# EAGLE board SparkFun_EL_Escudo_Dos_Panel_v21 (EAGLE 7.4.0), part 1 of 3
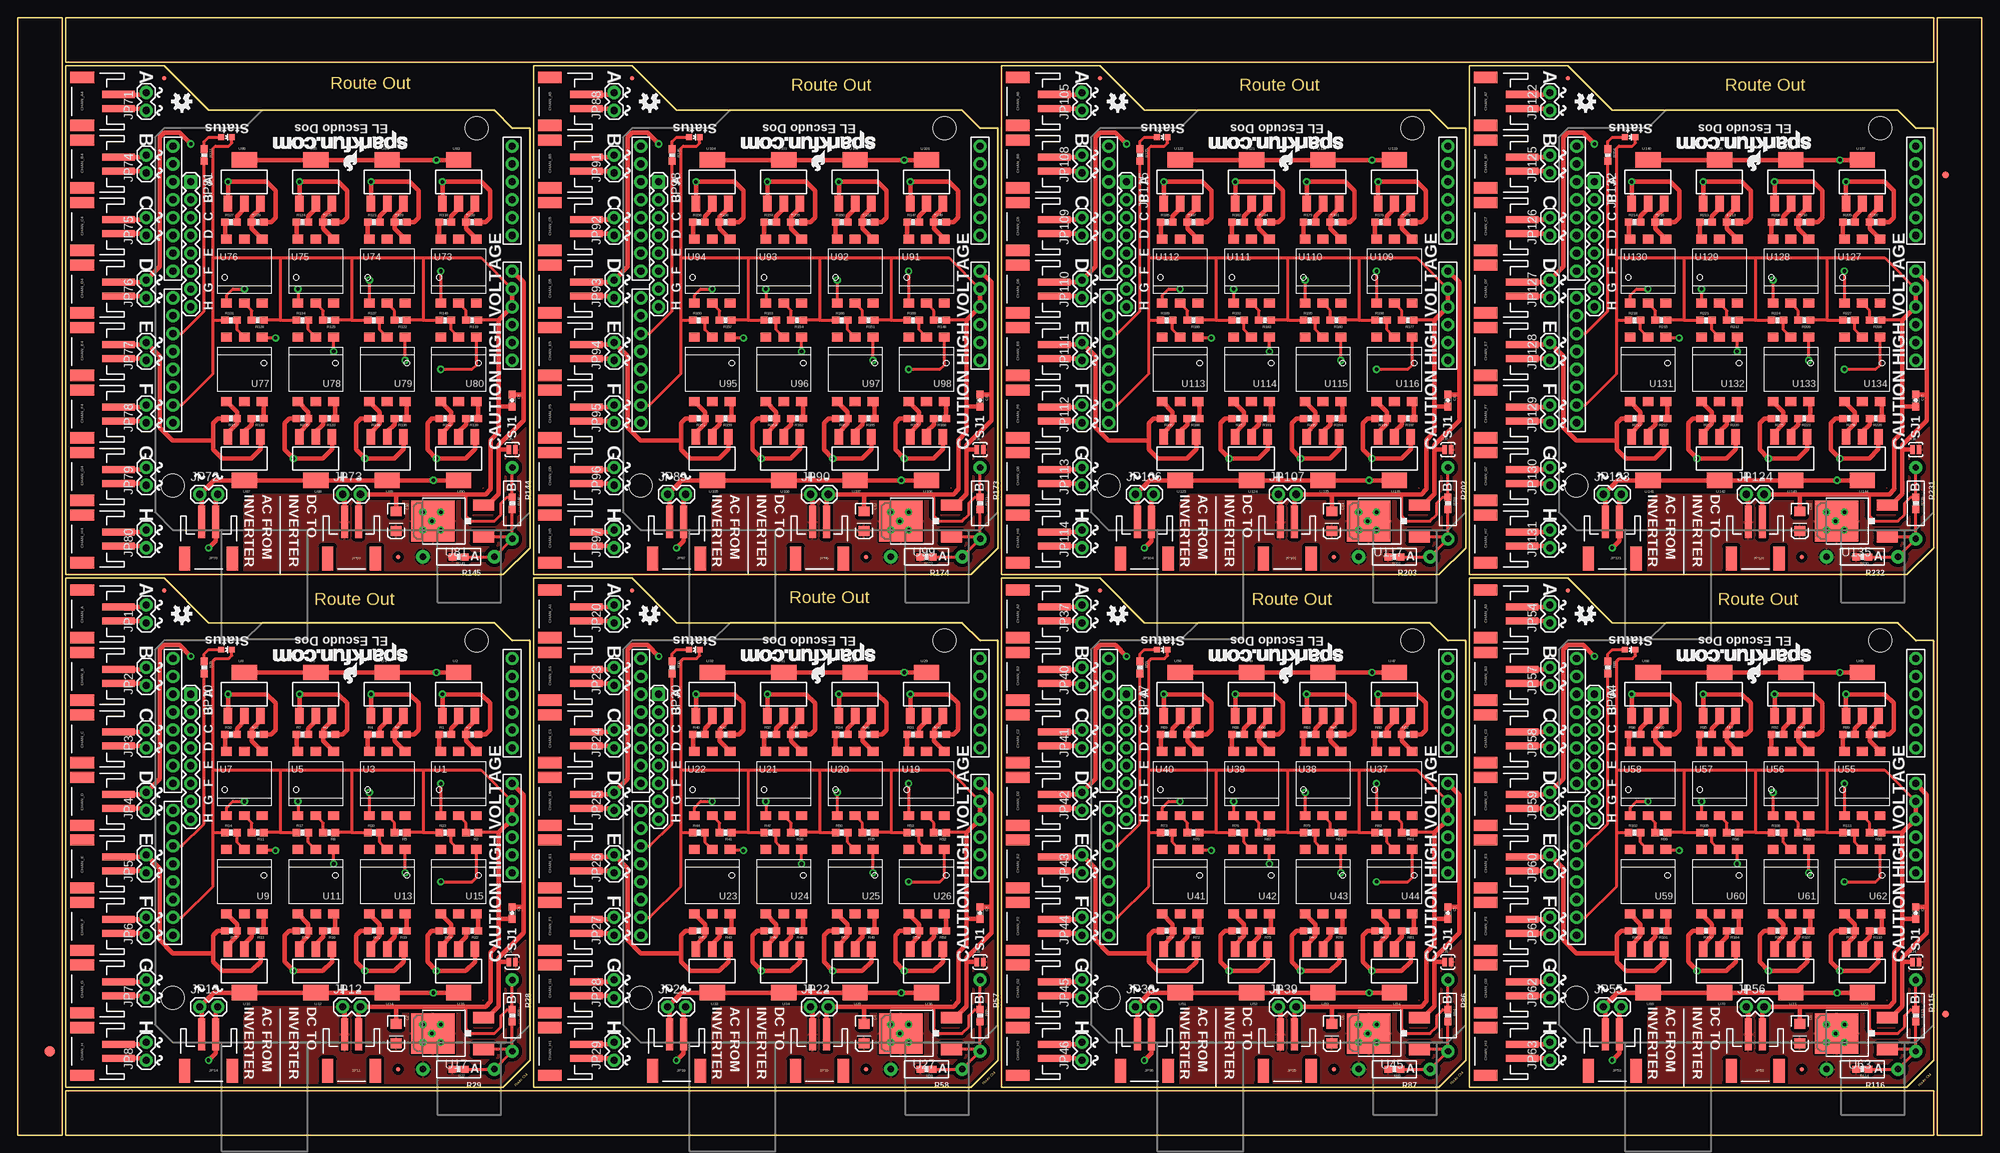
[diagram p0: board, top side]
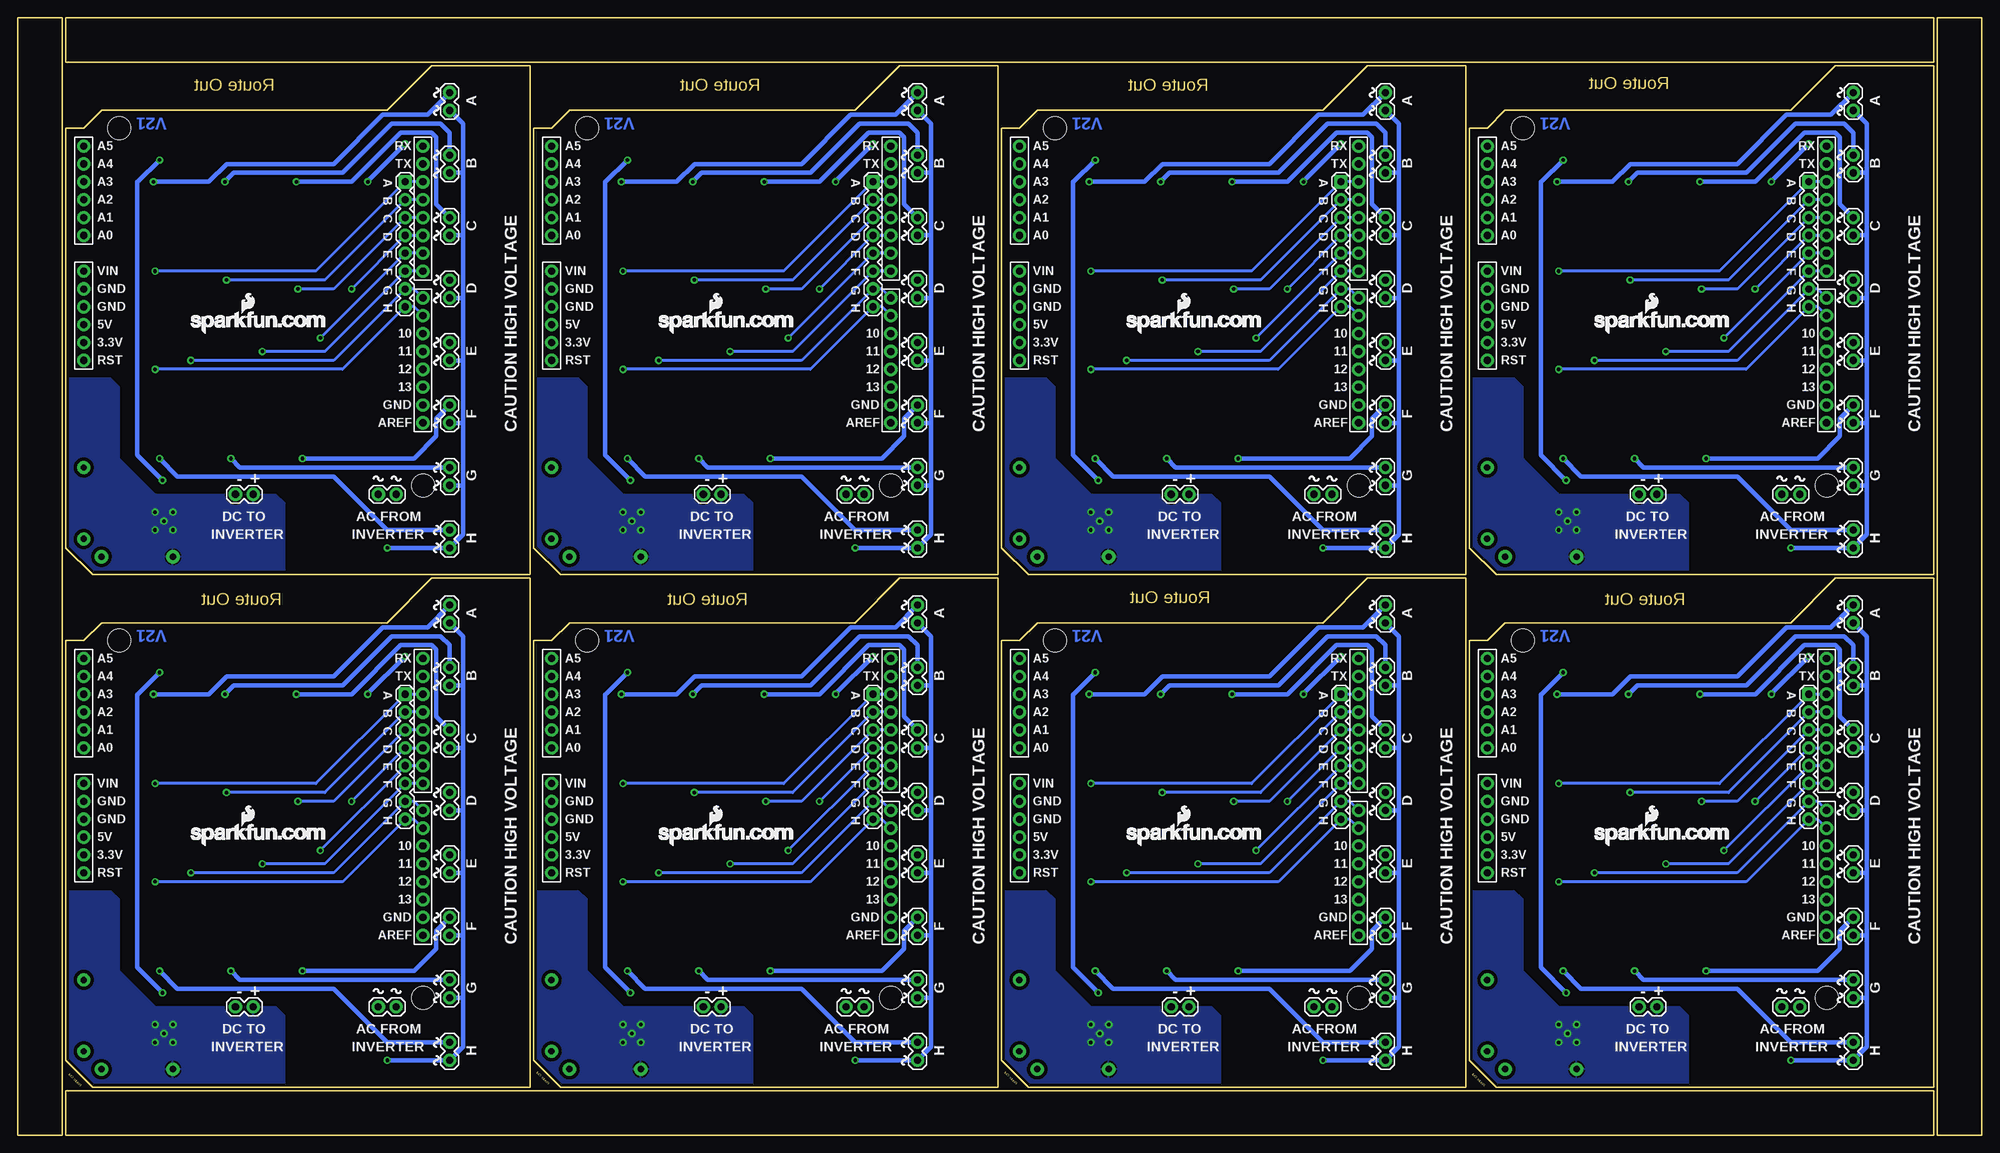
[diagram p1: board, bottom side, seen from below]

Size 279.4 x 159 mm. Coordinates in mm from the lower left corner, seen from the top.
Outline: 6.35,79.25 6.35,0 0,0 0,29.72
Outline: 0,27.18 0,159 6.35,159 6.35,76.71
Outline: 79.25,0 6.86,0 6.86,6.35 29.72,6.35
Outline: 27.18,6.35 272.54,6.35 272.54,0 76.71,0
Outline: 279.4,79.25 279.4,0 273.05,0 273.05,29.72
Outline: 273.05,27.18 273.05,159 279.4,159 279.4,76.71
Outline: 199.39,159 272.54,159 272.54,152.65 248.92,152.65
Outline: 251.46,152.65 6.86,152.65 6.86,159 201.93,159
Outline: 27.18,72.9 20.83,79.25 6.86,79.25 6.86,6.86 69.09,6.86 72.9,10.67 72.9,70.36 70.36,70.36 67.82,72.9 27.18,72.9
Outline: 93.73,72.9 87.38,79.25 73.41,79.25 73.41,6.86 135.64,6.86 139.45,10.67 139.45,70.36 136.91,70.36 134.37,72.9 93.73,72.9
Outline: 160.27,72.9 153.92,79.25 139.95,79.25 139.95,6.86 202.18,6.86 205.99,10.67 205.99,70.36 203.45,70.36 200.91,72.9 160.27,72.9
Outline: 226.82,72.9 220.47,79.25 206.5,79.25 206.5,6.86 268.73,6.86 272.54,10.67 272.54,70.36 270,70.36 267.46,72.9 226.82,72.9
Outline: 27.18,145.8 20.83,152.15 6.86,152.15 6.86,79.76 69.09,79.76 72.9,83.57 72.9,143.26 70.36,143.26 67.82,145.8 27.18,145.8
Outline: 93.73,145.8 87.38,152.15 73.41,152.15 73.41,79.76 135.64,79.76 139.45,83.57 139.45,143.26 136.91,143.26 134.37,145.8 93.73,145.8
Outline: 160.27,145.8 153.92,152.15 139.95,152.15 139.95,79.76 202.18,79.76 205.99,83.57 205.99,143.26 203.45,143.26 200.91,145.8 160.27,145.8
Outline: 226.82,145.8 220.47,152.15 206.5,152.15 206.5,79.76 268.73,79.76 272.54,83.57 272.54,143.26 270,143.26 267.46,145.8 226.82,145.8
Copper layers (1*16): Top 0.035mm / dielectric 1.5mm / Bottom 0.035mm
Design rules "default": minimum track width 8mil, minimum drill 20mil, track to track 0.5mm, track to pad 0.5mm, pad to pad 0.5mm, via to via 0.5mm, smd to smd 8mil, copper to edge 10mil, drill to drill 8mil, minimum pad ring 12mil, minimum via ring 10mil, stop-mask expansion 4mil, vias tented up to drill 25mil, thermal gap 10mil
Net classes: 0 Default: width 0.203 mm; 1 VCC: width 0.305 mm; 2 GND: width 0.813 mm; 3 HV: width 0.381 mm

## Footprints (pad centres in the part's own frame; a part is rotated, then mirrored left to right if it is on the bottom)
0603-CAP = smd 1.1 x 1: 1 -0.85,0; 2 0.85,0
EIA3216 = smd 1.4 x 1.6: A 1.4,0; C -1.4,0
JST-2-SMD = smd 1 x 4.6: 1 -1,-3.7; 2 1,-3.7 | smd 1.6 x 3.4: NC1 -3.4,1.5; NC2 3.4,1.5
LED-0603 = smd 0.8 x 0.8: A 0,-0.75; C 0,0.75
FIDUCIAL-1.5X3 = smd 1.5 x 1.5: 1 0,0
FIDUCIAL-1X2 = smd 1 x 1: 1 0,0
1X02 = drill 1.016 pad 1.88: 1 0,0; 2 2.54,0
1X08 = drill 1.016 pad 1.88 square: 1 0,0 | drill 1.016 pad 1.88: 2 2.54,0; 3 5.08,0; 4 7.62,0; 5 10.16,0; 6 12.7,0; 7 15.24,0; 8 17.78,0
MICRO-FIDUCIAL = smd 0.635 x 0.635: 1 0,0
0603-RES = smd 1.1 x 1: 1 -0.85,0; 2 0.85,0
AXIAL-0.4 = drill 0.9 pad 1.88: P$1 -5.08,0; P$2 5.08,0
SJ_2S-NO = smd 0.635 x 1.27: 1 -0.45,0; 2 0.45,0
DIP8SMD = smd 1.524 x 1.27: 1 -2.54,-4.572; 2 0,-4.572; 3 2.54,-4.572; 4 2.54,4.572; 5 0,4.572; 6 -2.54,4.572
SOT223 = smd 1.219 x 2.235: 1 -2.311,-3.099; 2 0,-3.099; 3 2.311,-3.099 | smd 3.6 x 2.2: 4 0,3.099
V-REG_DPACK = smd 1.6 x 3: 1 -2.28,-4.8; 3 2.28,-4.8 | smd 5.8 x 6.2: 4 0,2.38
DUEMILANOVE_SHIELD_NOLABELS = drill 1.016 pad 1.88: 3.3V 50.8,26.67; 5V 50.8,29.21; A0 50.8,41.91; A1 50.8,44.45; A2 50.8,46.99; A3 50.8,49.53; A4 50.8,52.07; A5 50.8,54.61; AREF 2.54,15.24; D2 2.54,49.53; D3 2.54,46.99; D4 2.54,44.45; D5 2.54,41.91; D6 2.54,39.37; D7 2.54,36.83; D8 2.54,33.02; D9 2.54,30.48; D10 2.54,27.94; D11 2.54,25.4; D12 2.54,22.86; D13 2.54,20.32; GND@0 50.8,31.75; GND@1 50.8,34.29; GND@2 2.54,17.78; RES 50.8,24.13; RX 2.54,54.61; TX 2.54,52.07; VIN 50.8,36.83 | hole 3.302: 45.72,57.15; 2.54,6.35

## Placement (x,y rotation side)
C1  0.1uF  [0603-CAP]  70.36,31.62 270 top
C2  10uF  [EIA3216]  53.85,14.48 270 top
C3  0.1uF  [0603-CAP]  136.91,31.62 270 top
C4  10uF  [EIA3216]  120.4,14.48 270 top
C5  0.1uF  [0603-CAP]  203.45,31.62 270 top
C6  10uF  [EIA3216]  186.94,14.48 270 top
C7  0.1uF  [0603-CAP]  270,31.62 270 top
C8  10uF  [EIA3216]  253.49,14.48 270 top
C9  0.1uF  [0603-CAP]  70.36,104.52 270 top
C10  10uF  [EIA3216]  53.85,87.38 270 top
C11  0.1uF  [0603-CAP]  136.91,104.52 270 top
C12  10uF  [EIA3216]  120.4,87.38 270 top
C13  0.1uF  [0603-CAP]  203.45,104.52 270 top
C14  10uF  [EIA3216]  186.94,87.38 270 top
C15  0.1uF  [0603-CAP]  270,104.52 270 top
C16  10uF  [EIA3216]  253.49,87.38 270 top
CHAN_A  [JST-2-SMD]  10.67,74.17 90 top
CHAN_A1  [JST-2-SMD]  77.22,74.17 90 top
CHAN_A2  [JST-2-SMD]  143.76,74.17 90 top
CHAN_A3  [JST-2-SMD]  210.31,74.17 90 top
CHAN_A4  [JST-2-SMD]  10.67,147.07 90 top
CHAN_A5  [JST-2-SMD]  77.22,147.07 90 top
CHAN_A6  [JST-2-SMD]  143.76,147.07 90 top
CHAN_A7  [JST-2-SMD]  210.31,147.07 90 top
CHAN_B  [JST-2-SMD]  10.67,65.28 90 top
CHAN_B1  [JST-2-SMD]  77.22,65.28 90 top
CHAN_B2  [JST-2-SMD]  143.76,65.28 90 top
CHAN_B3  [JST-2-SMD]  210.31,65.28 90 top
CHAN_B4  [JST-2-SMD]  10.67,138.18 90 top
CHAN_B5  [JST-2-SMD]  77.22,138.18 90 top
CHAN_B6  [JST-2-SMD]  143.76,138.18 90 top
CHAN_B7  [JST-2-SMD]  210.31,138.18 90 top
CHAN_C  [JST-2-SMD]  10.67,56.39 90 top
CHAN_C1  [JST-2-SMD]  77.22,56.39 90 top
CHAN_C2  [JST-2-SMD]  143.76,56.39 90 top
CHAN_C3  [JST-2-SMD]  210.31,56.39 90 top
CHAN_C4  [JST-2-SMD]  10.67,129.29 90 top
CHAN_C5  [JST-2-SMD]  77.22,129.29 90 top
CHAN_C6  [JST-2-SMD]  143.76,129.29 90 top
CHAN_C7  [JST-2-SMD]  210.31,129.29 90 top
CHAN_D  [JST-2-SMD]  10.67,47.5 90 top
CHAN_D1  [JST-2-SMD]  77.22,47.5 90 top
CHAN_D2  [JST-2-SMD]  143.76,47.5 90 top
CHAN_D3  [JST-2-SMD]  210.31,47.5 90 top
CHAN_D4  [JST-2-SMD]  10.67,120.4 90 top
CHAN_D5  [JST-2-SMD]  77.22,120.4 90 top
CHAN_D6  [JST-2-SMD]  143.76,120.4 90 top
CHAN_D7  [JST-2-SMD]  210.31,120.4 90 top
CHAN_E  [JST-2-SMD]  10.67,38.61 90 top
CHAN_E1  [JST-2-SMD]  77.22,38.61 90 top
CHAN_E2  [JST-2-SMD]  143.76,38.61 90 top
CHAN_E3  [JST-2-SMD]  210.31,38.61 90 top
CHAN_E4  [JST-2-SMD]  10.67,111.51 90 top
CHAN_E5  [JST-2-SMD]  77.22,111.51 90 top
CHAN_E6  [JST-2-SMD]  143.76,111.51 90 top
CHAN_E7  [JST-2-SMD]  210.31,111.51 90 top
CHAN_F  [JST-2-SMD]  10.67,29.72 90 top
CHAN_F1  [JST-2-SMD]  77.22,29.72 90 top
CHAN_F2  [JST-2-SMD]  143.76,29.72 90 top
CHAN_F3  [JST-2-SMD]  210.31,29.72 90 top
CHAN_F4  [JST-2-SMD]  10.67,102.62 90 top
CHAN_F5  [JST-2-SMD]  77.22,102.62 90 top
CHAN_F6  [JST-2-SMD]  143.76,102.62 90 top
CHAN_F7  [JST-2-SMD]  210.31,102.62 90 top
CHAN_G  [JST-2-SMD]  10.67,20.83 90 top
CHAN_G1  [JST-2-SMD]  77.22,20.83 90 top
CHAN_G2  [JST-2-SMD]  143.76,20.83 90 top
CHAN_G3  [JST-2-SMD]  210.31,20.83 90 top
CHAN_G4  [JST-2-SMD]  10.67,93.73 90 top
CHAN_G5  [JST-2-SMD]  77.22,93.73 90 top
CHAN_G6  [JST-2-SMD]  143.76,93.73 90 top
CHAN_G7  [JST-2-SMD]  210.31,93.73 90 top
CHAN_H  [JST-2-SMD]  10.67,11.94 90 top
CHAN_H1  [JST-2-SMD]  77.22,11.94 90 top
CHAN_H2  [JST-2-SMD]  143.76,11.94 90 top
CHAN_H3  [JST-2-SMD]  210.31,11.94 90 top
CHAN_H4  [JST-2-SMD]  10.67,84.84 90 top
CHAN_H5  [JST-2-SMD]  77.22,84.84 90 top
CHAN_H6  [JST-2-SMD]  143.76,84.84 90 top
CHAN_H7  [JST-2-SMD]  210.31,84.84 90 top
D1  Status  [LED-0603]  29.72,69.09 270 top
D2  Status  [LED-0603]  96.27,69.09 270 top
D3  Status  [LED-0603]  162.81,69.09 270 top
D4  Status  [LED-0603]  229.36,69.09 270 top
D5  Status  [LED-0603]  29.72,141.99 270 top
D6  Status  [LED-0603]  96.27,141.99 270 top
D7  Status  [LED-0603]  162.81,141.99 270 top
D8  Status  [LED-0603]  229.36,141.99 270 top
E$1  [FIDUCIAL-1.5X3]  4.57,11.94 0 top
E$5  [FIDUCIAL-1X2]  274.19,17.27 0 top
E$6  [FIDUCIAL-1X2]  274.19,136.65 180 top
JP1  [1X02]  18.29,72.9 90 top
JP2  [1X02]  18.29,64.01 90 top
JP3  [1X02]  18.29,55.12 90 top
JP4  [1X02]  18.29,46.23 90 top
JP5  [1X02]  18.29,37.34 90 top
JP6  [1X02]  18.29,28.45 90 top
JP7  [1X02]  18.29,19.56 90 top
JP8  [1X02]  18.29,10.67 90 top
JP9  LOGO-SFENEW  [SFE-NEW-WEBLOGO]  55.44,70.04 180 top
JP10  [1X08]  24.64,62.74 270 top
JP11  [JST-2-SMD]  47.5,10.67 180 top
JP12  [1X02]  46.23,18.29 0 top
JP13  [1X02]  25.91,18.29 0 top
JP14  [JST-2-SMD]  27.18,10.67 180 top
JP15  LOGO-SFENEW  [SFE-NEW-WEBLOGO]  55.12,41.15 0 bottom
JP16  FIDUCIALUFIDUCIAL  [MICRO-FIDUCIAL]  20.83,77.47 0 top
JP17  FIDUCIALUFIDUCIAL  [MICRO-FIDUCIAL]  54.1,9.4 0 top
JP18  [JST-2-SMD]  114.05,10.67 180 top
JP19  [JST-2-SMD]  93.73,10.67 180 top
JP20  [1X02]  84.84,72.9 90 top
JP21  [1X02]  92.46,18.29 0 top
JP22  [1X02]  112.78,18.29 0 top
JP23  [1X02]  84.84,64.01 90 top
JP24  [1X02]  84.84,55.12 90 top
JP25  [1X02]  84.84,46.23 90 top
JP26  [1X02]  84.84,37.34 90 top
JP27  [1X02]  84.84,28.45 90 top
JP28  [1X02]  84.84,19.56 90 top
JP29  [1X02]  84.84,10.67 90 top
JP30  [1X08]  91.19,62.74 270 top
JP31  LOGO-SFENEW  [SFE-NEW-WEBLOGO]  121.98,70.04 180 top
JP32  LOGO-SFENEW  [SFE-NEW-WEBLOGO]  121.67,41.15 0 bottom
JP33  FIDUCIALUFIDUCIAL  [MICRO-FIDUCIAL]  87.38,77.47 0 top
JP34  FIDUCIALUFIDUCIAL  [MICRO-FIDUCIAL]  120.65,9.4 0 top
JP35  [JST-2-SMD]  180.59,10.67 180 top
JP36  [JST-2-SMD]  160.27,10.67 180 top
JP37  [1X02]  151.38,72.9 90 top
JP38  [1X02]  159,18.29 0 top
JP39  [1X02]  179.32,18.29 0 top
JP40  [1X02]  151.38,64.01 90 top
JP41  [1X02]  151.38,55.12 90 top
JP42  [1X02]  151.38,46.23 90 top
JP43  [1X02]  151.38,37.34 90 top
JP44  [1X02]  151.38,28.45 90 top
JP45  [1X02]  151.38,19.56 90 top
JP46  [1X02]  151.38,10.67 90 top
JP47  [1X08]  157.73,62.74 270 top
JP48  LOGO-SFENEW  [SFE-NEW-WEBLOGO]  188.53,70.04 180 top
JP49  LOGO-SFENEW  [SFE-NEW-WEBLOGO]  188.21,41.15 0 bottom
JP50  FIDUCIALUFIDUCIAL  [MICRO-FIDUCIAL]  153.92,77.47 0 top
JP51  FIDUCIALUFIDUCIAL  [MICRO-FIDUCIAL]  187.2,9.4 0 top
JP52  [JST-2-SMD]  247.14,10.67 180 top
JP53  [JST-2-SMD]  226.82,10.67 180 top
JP54  [1X02]  217.93,72.9 90 top
JP55  [1X02]  225.55,18.29 0 top
JP56  [1X02]  245.87,18.29 0 top
JP57  [1X02]  217.93,64.01 90 top
JP58  [1X02]  217.93,55.12 90 top
JP59  [1X02]  217.93,46.23 90 top
JP60  [1X02]  217.93,37.34 90 top
JP61  [1X02]  217.93,28.45 90 top
JP62  [1X02]  217.93,19.56 90 top
JP63  [1X02]  217.93,10.67 90 top
JP64  [1X08]  224.28,62.74 270 top
JP65  LOGO-SFENEW  [SFE-NEW-WEBLOGO]  255.08,70.04 180 top
JP66  LOGO-SFENEW  [SFE-NEW-WEBLOGO]  254.76,41.15 0 bottom
JP67  FIDUCIALUFIDUCIAL  [MICRO-FIDUCIAL]  220.47,77.47 0 top
JP68  FIDUCIALUFIDUCIAL  [MICRO-FIDUCIAL]  253.75,9.4 0 top
JP69  [JST-2-SMD]  47.5,83.57 180 top
JP70  [JST-2-SMD]  27.18,83.57 180 top
JP71  [1X02]  18.29,145.8 90 top
JP72  [1X02]  25.91,91.19 0 top
JP73  [1X02]  46.23,91.19 0 top
JP74  [1X02]  18.29,136.91 90 top
JP75  [1X02]  18.29,128.02 90 top
JP76  [1X02]  18.29,119.13 90 top
JP77  [1X02]  18.29,110.24 90 top
JP78  [1X02]  18.29,101.35 90 top
JP79  [1X02]  18.29,92.46 90 top
JP80  [1X02]  18.29,83.57 90 top
JP81  [1X08]  24.64,135.64 270 top
JP82  LOGO-SFENEW  [SFE-NEW-WEBLOGO]  55.44,142.94 180 top
JP83  LOGO-SFENEW  [SFE-NEW-WEBLOGO]  55.12,114.05 0 bottom
JP84  FIDUCIALUFIDUCIAL  [MICRO-FIDUCIAL]  20.83,150.37 0 top
JP85  FIDUCIALUFIDUCIAL  [MICRO-FIDUCIAL]  54.1,82.3 0 top
JP86  [JST-2-SMD]  114.05,83.57 180 top
JP87  [JST-2-SMD]  93.73,83.57 180 top
JP88  [1X02]  84.84,145.8 90 top
JP89  [1X02]  92.46,91.19 0 top
JP90  [1X02]  112.78,91.19 0 top
JP91  [1X02]  84.84,136.91 90 top
JP92  [1X02]  84.84,128.02 90 top
JP93  [1X02]  84.84,119.13 90 top
JP94  [1X02]  84.84,110.24 90 top
JP95  [1X02]  84.84,101.35 90 top
JP96  [1X02]  84.84,92.46 90 top
JP97  [1X02]  84.84,83.57 90 top
JP98  [1X08]  91.19,135.64 270 top
JP99  LOGO-SFENEW  [SFE-NEW-WEBLOGO]  121.98,142.94 180 top
JP100  LOGO-SFENEW  [SFE-NEW-WEBLOGO]  121.67,114.05 0 bottom
JP101  FIDUCIALUFIDUCIAL  [MICRO-FIDUCIAL]  87.38,150.37 0 top
JP102  FIDUCIALUFIDUCIAL  [MICRO-FIDUCIAL]  120.65,82.3 0 top
JP103  [JST-2-SMD]  180.59,83.57 180 top
JP104  [JST-2-SMD]  160.27,83.57 180 top
JP105  [1X02]  151.38,145.8 90 top
JP106  [1X02]  159,91.19 0 top
JP107  [1X02]  179.32,91.19 0 top
JP108  [1X02]  151.38,136.91 90 top
JP109  [1X02]  151.38,128.02 90 top
JP110  [1X02]  151.38,119.13 90 top
JP111  [1X02]  151.38,110.24 90 top
JP112  [1X02]  151.38,101.35 90 top
JP113  [1X02]  151.38,92.46 90 top
JP114  [1X02]  151.38,83.57 90 top
JP115  [1X08]  157.73,135.64 270 top
JP116  LOGO-SFENEW  [SFE-NEW-WEBLOGO]  188.53,142.94 180 top
JP117  LOGO-SFENEW  [SFE-NEW-WEBLOGO]  188.21,114.05 0 bottom
JP118  FIDUCIALUFIDUCIAL  [MICRO-FIDUCIAL]  153.92,150.37 0 top
JP119  FIDUCIALUFIDUCIAL  [MICRO-FIDUCIAL]  187.2,82.3 0 top
JP120  [JST-2-SMD]  247.14,83.57 180 top
JP121  [JST-2-SMD]  226.82,83.57 180 top
JP122  [1X02]  217.93,145.8 90 top
JP123  [1X02]  225.55,91.19 0 top
JP124  [1X02]  245.87,91.19 0 top
JP125  [1X02]  217.93,136.91 90 top
JP126  [1X02]  217.93,128.02 90 top
JP127  [1X02]  217.93,119.13 90 top
JP128  [1X02]  217.93,110.24 90 top
JP129  [1X02]  217.93,101.35 90 top
JP130  [1X02]  217.93,92.46 90 top
JP131  [1X02]  217.93,83.57 90 top
JP132  [1X08]  224.28,135.64 270 top
JP133  LOGO-SFENEW  [SFE-NEW-WEBLOGO]  255.08,142.94 180 top
JP134  LOGO-SFENEW  [SFE-NEW-WEBLOGO]  254.76,114.05 0 bottom
JP135  FIDUCIALUFIDUCIAL  [MICRO-FIDUCIAL]  220.47,150.37 0 top
JP136  FIDUCIALUFIDUCIAL  [MICRO-FIDUCIAL]  253.75,82.3 0 top
R1  330  [0603-RES]  60.83,57.02 0 top
R2  390  [0603-RES]  64.64,43.05 180 top
R3  330  [0603-RES]  64.64,57.02 0 top
R4  330  [0603-RES]  50.67,57.02 0 top
R5  390  [0603-RES]  54.48,43.05 180 top
R6  330  [0603-RES]  54.48,57.02 0 top
R7  330  [0603-RES]  40.51,57.02 0 top
R8  390  [0603-RES]  44.32,43.05 180 top
R9  330  [0603-RES]  44.32,57.02 0 top
R10  330  [0603-RES]  30.35,57.02 0 top
R11  390  [0603-RES]  34.16,43.05 180 top
R12  330  [0603-RES]  34.16,57.02 0 top
R13  330  [0603-RES]  34.16,29.08 180 top
R14  390  [0603-RES]  30.35,43.05 0 top
R15  330  [0603-RES]  30.35,29.08 180 top
R16  330  [0603-RES]  44.32,29.08 180 top
R17  390  [0603-RES]  40.51,43.05 0 top
R18  330  [0603-RES]  40.51,29.08 180 top
R19  330  [0603-RES]  54.48,29.08 180 top
R20  390  [0603-RES]  50.67,43.05 0 top
R21  330  [0603-RES]  50.67,29.08 180 top
R22  330  [0603-RES]  64.64,29.08 180 top
R23  390  [0603-RES]  60.83,43.05 0 top
R24  330  [0603-RES]  60.83,29.08 180 top
R25  330  [0603-RES]  26.54,66.55 270 top
R26  390  [0603-RES]  70.36,17.02 270 top
R27  240  [0603-RES]  62.74,9.4 180 top
R28  B  [AXIAL-0.4]  70.36,17.02 270 top
R29  A  [AXIAL-0.4]  62.74,9.4 180 top
R30  330  [0603-RES]  93.09,66.55 270 top
R31  330  [0603-RES]  127.38,57.02 0 top
R32  390  [0603-RES]  131.19,43.05 180 top
R33  330  [0603-RES]  131.19,57.02 0 top
R34  330  [0603-RES]  117.22,57.02 0 top
R35  390  [0603-RES]  121.03,43.05 180 top
R36  330  [0603-RES]  121.03,57.02 0 top
R37  330  [0603-RES]  107.06,57.02 0 top
R38  390  [0603-RES]  110.87,43.05 180 top
R39  330  [0603-RES]  110.87,57.02 0 top
R40  330  [0603-RES]  96.9,57.02 0 top
R41  390  [0603-RES]  100.71,43.05 180 top
R42  330  [0603-RES]  100.71,57.02 0 top
R43  330  [0603-RES]  100.71,29.08 180 top
R44  390  [0603-RES]  96.9,43.05 0 top
R45  330  [0603-RES]  96.9,29.08 180 top
R46  330  [0603-RES]  110.87,29.08 180 top
R47  390  [0603-RES]  107.06,43.05 0 top
R48  330  [0603-RES]  107.06,29.08 180 top
R49  330  [0603-RES]  121.03,29.08 180 top
R50  390  [0603-RES]  117.22,43.05 0 top
R51  330  [0603-RES]  117.22,29.08 180 top
R52  330  [0603-RES]  131.19,29.08 180 top
R53  390  [0603-RES]  127.38,43.05 0 top
R54  330  [0603-RES]  127.38,29.08 180 top
R55  390  [0603-RES]  136.91,17.02 270 top
R56  240  [0603-RES]  129.29,9.4 180 top
R57  B  [AXIAL-0.4]  136.91,17.02 270 top
R58  A  [AXIAL-0.4]  129.29,9.4 180 top
R59  330  [0603-RES]  159.64,66.55 270 top
R60  330  [0603-RES]  193.93,57.02 0 top
R61  390  [0603-RES]  197.74,43.05 180 top
R62  330  [0603-RES]  197.74,57.02 0 top
R63  330  [0603-RES]  183.77,57.02 0 top
R64  390  [0603-RES]  187.58,43.05 180 top
R65  330  [0603-RES]  187.58,57.02 0 top
R66  330  [0603-RES]  173.61,57.02 0 top
R67  390  [0603-RES]  177.42,43.05 180 top
R68  330  [0603-RES]  177.42,57.02 0 top
R69  330  [0603-RES]  163.45,57.02 0 top
R70  390  [0603-RES]  167.26,43.05 180 top
R71  330  [0603-RES]  167.26,57.02 0 top
R72  330  [0603-RES]  167.26,29.08 180 top
R73  390  [0603-RES]  163.45,43.05 0 top
R74  330  [0603-RES]  163.45,29.08 180 top
R75  330  [0603-RES]  177.42,29.08 180 top
R76  390  [0603-RES]  173.61,43.05 0 top
R77  330  [0603-RES]  173.61,29.08 180 top
R78  330  [0603-RES]  187.58,29.08 180 top
R79  390  [0603-RES]  183.77,43.05 0 top
R80  330  [0603-RES]  183.77,29.08 180 top
R81  330  [0603-RES]  197.74,29.08 180 top
R82  390  [0603-RES]  193.93,43.05 0 top
R83  330  [0603-RES]  193.93,29.08 180 top
R84  390  [0603-RES]  203.45,17.02 270 top
R85  240  [0603-RES]  195.83,9.4 180 top
R86  B  [AXIAL-0.4]  203.45,17.02 270 top
R87  A  [AXIAL-0.4]  195.83,9.4 180 top
R88  330  [0603-RES]  226.19,66.55 270 top
R89  330  [0603-RES]  260.48,57.02 0 top
R90  390  [0603-RES]  264.29,43.05 180 top
R91  330  [0603-RES]  264.29,57.02 0 top
R92  330  [0603-RES]  250.32,57.02 0 top
R93  390  [0603-RES]  254.13,43.05 180 top
R94  330  [0603-RES]  254.13,57.02 0 top
R95  330  [0603-RES]  240.16,57.02 0 top
R96  390  [0603-RES]  243.97,43.05 180 top
R97  330  [0603-RES]  243.97,57.02 0 top
R98  330  [0603-RES]  230,57.02 0 top
R99  390  [0603-RES]  233.81,43.05 180 top
R100  330  [0603-RES]  233.81,57.02 0 top
R101  330  [0603-RES]  233.81,29.08 180 top
R102  390  [0603-RES]  230,43.05 0 top
R103  330  [0603-RES]  230,29.08 180 top
R104  330  [0603-RES]  243.97,29.08 180 top
R105  390  [0603-RES]  240.16,43.05 0 top
R106  330  [0603-RES]  240.16,29.08 180 top
R107  330  [0603-RES]  254.13,29.08 180 top
R108  390  [0603-RES]  250.32,43.05 0 top
R109  330  [0603-RES]  250.32,29.08 180 top
R110  330  [0603-RES]  264.29,29.08 180 top
R111  390  [0603-RES]  260.48,43.05 0 top
R112  330  [0603-RES]  260.48,29.08 180 top
R113  390  [0603-RES]  270,17.02 270 top
R114  240  [0603-RES]  262.38,9.4 180 top
R115  B  [AXIAL-0.4]  270,17.02 270 top
R116  A  [AXIAL-0.4]  262.38,9.4 180 top
R117  330  [0603-RES]  26.54,139.45 270 top
R118  330  [0603-RES]  60.83,129.92 0 top
R119  390  [0603-RES]  64.64,115.95 180 top
R120  330  [0603-RES]  64.64,129.92 0 top
R121  330  [0603-RES]  50.67,129.92 0 top
R122  390  [0603-RES]  54.48,115.95 180 top
R123  330  [0603-RES]  54.48,129.92 0 top
R124  330  [0603-RES]  40.51,129.92 0 top
R125  390  [0603-RES]  44.32,115.95 180 top
R126  330  [0603-RES]  44.32,129.92 0 top
R127  330  [0603-RES]  30.35,129.92 0 top
R128  390  [0603-RES]  34.16,115.95 180 top
R129  330  [0603-RES]  34.16,129.92 0 top
R130  330  [0603-RES]  34.16,101.98 180 top
R131  390  [0603-RES]  30.35,115.95 0 top
R132  330  [0603-RES]  30.35,101.98 180 top
R133  330  [0603-RES]  44.32,101.98 180 top
R134  390  [0603-RES]  40.51,115.95 0 top
R135  330  [0603-RES]  40.51,101.98 180 top
R136  330  [0603-RES]  54.48,101.98 180 top
R137  390  [0603-RES]  50.67,115.95 0 top
R138  330  [0603-RES]  50.67,101.98 180 top
R139  330  [0603-RES]  64.64,101.98 180 top
R140  390  [0603-RES]  60.83,115.95 0 top
R141  330  [0603-RES]  60.83,101.98 180 top
R142  390  [0603-RES]  70.36,89.92 270 top
R143  240  [0603-RES]  62.74,82.3 180 top
R144  B  [AXIAL-0.4]  70.36,89.92 270 top
R145  A  [AXIAL-0.4]  62.74,82.3 180 top
R146  330  [0603-RES]  93.09,139.45 270 top
R147  330  [0603-RES]  127.38,129.92 0 top
R148  390  [0603-RES]  131.19,115.95 180 top
R149  330  [0603-RES]  131.19,129.92 0 top
R150  330  [0603-RES]  117.22,129.92 0 top
R151  390  [0603-RES]  121.03,115.95 180 top
R152  330  [0603-RES]  121.03,129.92 0 top
R153  330  [0603-RES]  107.06,129.92 0 top
R154  390  [0603-RES]  110.87,115.95 180 top
R155  330  [0603-RES]  110.87,129.92 0 top
R156  330  [0603-RES]  96.9,129.92 0 top
R157  390  [0603-RES]  100.71,115.95 180 top
R158  330  [0603-RES]  100.71,129.92 0 top
R159  330  [0603-RES]  100.71,101.98 180 top
R160  390  [0603-RES]  96.9,115.95 0 top
R161  330  [0603-RES]  96.9,101.98 180 top
R162  330  [0603-RES]  110.87,101.98 180 top
R163  390  [0603-RES]  107.06,115.95 0 top
R164  330  [0603-RES]  107.06,101.98 180 top
R165  330  [0603-RES]  121.03,101.98 180 top
R166  390  [0603-RES]  117.22,115.95 0 top
R167  330  [0603-RES]  117.22,101.98 180 top
R168  330  [0603-RES]  131.19,101.98 180 top
R169  390  [0603-RES]  127.38,115.95 0 top
R170  330  [0603-RES]  127.38,101.98 180 top
R171  390  [0603-RES]  136.91,89.92 270 top
R172  240  [0603-RES]  129.29,82.3 180 top
R173  B  [AXIAL-0.4]  136.91,89.92 270 top
R174  A  [AXIAL-0.4]  129.29,82.3 180 top
R175  330  [0603-RES]  159.64,139.45 270 top
R176  330  [0603-RES]  193.93,129.92 0 top
R177  390  [0603-RES]  197.74,115.95 180 top
R178  330  [0603-RES]  197.74,129.92 0 top
R179  330  [0603-RES]  183.77,129.92 0 top
R180  390  [0603-RES]  187.58,115.95 180 top
R181  330  [0603-RES]  187.58,129.92 0 top
R182  330  [0603-RES]  173.61,129.92 0 top
R183  390  [0603-RES]  177.42,115.95 180 top
R184  330  [0603-RES]  177.42,129.92 0 top
R185  330  [0603-RES]  163.45,129.92 0 top
R186  390  [0603-RES]  167.26,115.95 180 top
R187  330  [0603-RES]  167.26,129.92 0 top
R188  330  [0603-RES]  167.26,101.98 180 top
R189  390  [0603-RES]  163.45,115.95 0 top
R190  330  [0603-RES]  163.45,101.98 180 top
R191  330  [0603-RES]  177.42,101.98 180 top
R192  390  [0603-RES]  173.61,115.95 0 top
R193  330  [0603-RES]  173.61,101.98 180 top
R194  330  [0603-RES]  187.58,101.98 180 top
R195  390  [0603-RES]  183.77,115.95 0 top
R196  330  [0603-RES]  183.77,101.98 180 top
R197  330  [0603-RES]  197.74,101.98 180 top
R198  390  [0603-RES]  193.93,115.95 0 top
R199  330  [0603-RES]  193.93,101.98 180 top
R200  390  [0603-RES]  203.45,89.92 270 top
R201  240  [0603-RES]  195.83,82.3 180 top
R202  B  [AXIAL-0.4]  203.45,89.92 270 top
R203  A  [AXIAL-0.4]  195.83,82.3 180 top
R204  330  [0603-RES]  226.19,139.45 270 top
R205  330  [0603-RES]  260.48,129.92 0 top
R206  390  [0603-RES]  264.29,115.95 180 top
R207  330  [0603-RES]  264.29,129.92 0 top
R208  330  [0603-RES]  250.32,129.92 0 top
R209  390  [0603-RES]  254.13,115.95 180 top
R210  330  [0603-RES]  254.13,129.92 0 top
R211  330  [0603-RES]  240.16,129.92 0 top
R212  390  [0603-RES]  243.97,115.95 180 top
R213  330  [0603-RES]  243.97,129.92 0 top
R214  330  [0603-RES]  230,129.92 0 top
R215  390  [0603-RES]  233.81,115.95 180 top
R216  330  [0603-RES]  233.81,129.92 0 top
R217  330  [0603-RES]  233.81,101.98 180 top
R218  390  [0603-RES]  230,115.95 0 top
R219  330  [0603-RES]  230,101.98 180 top
R220  330  [0603-RES]  243.97,101.98 180 top
R221  390  [0603-RES]  240.16,115.95 0 top
R222  330  [0603-RES]  240.16,101.98 180 top
R223  330  [0603-RES]  254.13,101.98 180 top
R224  390  [0603-RES]  250.32,115.95 0 top
R225  330  [0603-RES]  250.32,101.98 180 top
R226  330  [0603-RES]  264.29,101.98 180 top
R227  390  [0603-RES]  260.48,115.95 0 top
R228  330  [0603-RES]  260.48,101.98 180 top
R229  390  [0603-RES]  270,89.92 270 top
R230  240  [0603-RES]  262.38,82.3 180 top
R231  B  [AXIAL-0.4]  270,89.92 270 top
R232  A  [AXIAL-0.4]  262.38,82.3 180 top
SJ1  [SJ_2S-NO]  70.36,24.64 0 top
SJ2  [SJ_2S-NO]  136.91,24.64 0 top
SJ3  [SJ_2S-NO]  203.45,24.64 0 top
SJ4  [SJ_2S-NO]  270,24.64 0 top
SJ5  [SJ_2S-NO]  70.36,97.54 0 top
SJ6  [SJ_2S-NO]  136.91,97.54 0 top
SJ7  [SJ_2S-NO]  203.45,97.54 0 top
SJ8  [SJ_2S-NO]  270,97.54 0 top
U1  MOC3063S  [DIP8SMD]  62.74,50.04 0 top
U2  Z0103MN  [SOT223]  62.74,62.74 0 top
U3  MOC3063S  [DIP8SMD]  52.58,50.04 0 top
U4  Z0103MN  [SOT223]  52.58,62.74 0 top
U5  MOC3063S  [DIP8SMD]  42.42,50.04 0 top
U6  Z0103MN  [SOT223]  42.42,62.74 0 top
U7  MOC3063S  [DIP8SMD]  32.26,50.04 0 top
U8  Z0103MN  [SOT223]  32.26,62.74 0 top
U9  MOC3063S  [DIP8SMD]  32.26,36.07 180 top
U10  Z0103MN  [SOT223]  32.26,23.37 180 top
U11  MOC3063S  [DIP8SMD]  42.42,36.07 180 top
U12  Z0103MN  [SOT223]  42.42,23.37 180 top
U13  MOC3063S  [DIP8SMD]  52.58,36.07 180 top
U14  Z0103MN  [SOT223]  52.58,23.37 180 top
U15  MOC3063S  [DIP8SMD]  62.74,36.07 180 top
U16  Z0103MN  [SOT223]  62.74,23.37 180 top
U17  LM317  [V-REG_DPACK]  61.47,14.48 90 top
U18  ARDUINO_SHIELD  [DUEMILANOVE_SHIELD_NOLABELS]  19.56,13.21 0 top
U19  MOC3063S  [DIP8SMD]  129.29,50.04 0 top
U20  MOC3063S  [DIP8SMD]  119.13,50.04 0 top
U21  MOC3063S  [DIP8SMD]  108.97,50.04 0 top
U22  MOC3063S  [DIP8SMD]  98.81,50.04 0 top
U23  MOC3063S  [DIP8SMD]  98.81,36.07 180 top
U24  MOC3063S  [DIP8SMD]  108.97,36.07 180 top
U25  MOC3063S  [DIP8SMD]  119.13,36.07 180 top
U26  MOC3063S  [DIP8SMD]  129.29,36.07 180 top
U27  LM317  [V-REG_DPACK]  128.02,14.48 90 top
U28  ARDUINO_SHIELD  [DUEMILANOVE_SHIELD_NOLABELS]  86.11,13.21 0 top
U29  Z0103MN  [SOT223]  129.29,62.74 0 top
U30  Z0103MN  [SOT223]  119.13,62.74 0 top
U31  Z0103MN  [SOT223]  108.97,62.74 0 top
U32  Z0103MN  [SOT223]  98.81,62.74 0 top
U33  Z0103MN  [SOT223]  98.81,23.37 180 top
U34  Z0103MN  [SOT223]  108.97,23.37 180 top
U35  Z0103MN  [SOT223]  119.13,23.37 180 top
U36  Z0103MN  [SOT223]  129.29,23.37 180 top
U37  MOC3063S  [DIP8SMD]  195.83,50.04 0 top
U38  MOC3063S  [DIP8SMD]  185.67,50.04 0 top
U39  MOC3063S  [DIP8SMD]  175.51,50.04 0 top
U40  MOC3063S  [DIP8SMD]  165.35,50.04 0 top
U41  MOC3063S  [DIP8SMD]  165.35,36.07 180 top
U42  MOC3063S  [DIP8SMD]  175.51,36.07 180 top
U43  MOC3063S  [DIP8SMD]  185.67,36.07 180 top
U44  MOC3063S  [DIP8SMD]  195.83,36.07 180 top
U45  LM317  [V-REG_DPACK]  194.56,14.48 90 top
U46  ARDUINO_SHIELD  [DUEMILANOVE_SHIELD_NOLABELS]  152.65,13.21 0 top
U47  Z0103MN  [SOT223]  195.83,62.74 0 top
U48  Z0103MN  [SOT223]  185.67,62.74 0 top
U49  Z0103MN  [SOT223]  175.51,62.74 0 top
U50  Z0103MN  [SOT223]  165.35,62.74 0 top
U51  Z0103MN  [SOT223]  165.35,23.37 180 top
U52  Z0103MN  [SOT223]  175.51,23.37 180 top
U53  Z0103MN  [SOT223]  185.67,23.37 180 top
U54  Z0103MN  [SOT223]  195.83,23.37 180 top
U55  MOC3063S  [DIP8SMD]  262.38,50.04 0 top
U56  MOC3063S  [DIP8SMD]  252.22,50.04 0 top
U57  MOC3063S  [DIP8SMD]  242.06,50.04 0 top
U58  MOC3063S  [DIP8SMD]  231.9,50.04 0 top
U59  MOC3063S  [DIP8SMD]  231.9,36.07 180 top
U60  MOC3063S  [DIP8SMD]  242.06,36.07 180 top
U61  MOC3063S  [DIP8SMD]  252.22,36.07 180 top
U62  MOC3063S  [DIP8SMD]  262.38,36.07 180 top
U63  LM317  [V-REG_DPACK]  261.11,14.48 90 top
U64  ARDUINO_SHIELD  [DUEMILANOVE_SHIELD_NOLABELS]  219.2,13.21 0 top
U65  Z0103MN  [SOT223]  262.38,62.74 0 top
U66  Z0103MN  [SOT223]  252.22,62.74 0 top
U67  Z0103MN  [SOT223]  242.06,62.74 0 top
U68  Z0103MN  [SOT223]  231.9,62.74 0 top
U69  Z0103MN  [SOT223]  231.9,23.37 180 top
U70  Z0103MN  [SOT223]  242.06,23.37 180 top
U71  Z0103MN  [SOT223]  252.22,23.37 180 top
U72  Z0103MN  [SOT223]  262.38,23.37 180 top
U73  MOC3063S  [DIP8SMD]  62.74,122.94 0 top
U74  MOC3063S  [DIP8SMD]  52.58,122.94 0 top
U75  MOC3063S  [DIP8SMD]  42.42,122.94 0 top
U76  MOC3063S  [DIP8SMD]  32.26,122.94 0 top
U77  MOC3063S  [DIP8SMD]  32.26,108.97 180 top
U78  MOC3063S  [DIP8SMD]  42.42,108.97 180 top
U79  MOC3063S  [DIP8SMD]  52.58,108.97 180 top
U80  MOC3063S  [DIP8SMD]  62.74,108.97 180 top
U81  LM317  [V-REG_DPACK]  61.47,87.38 90 top
U82  ARDUINO_SHIELD  [DUEMILANOVE_SHIELD_NOLABELS]  19.56,86.11 0 top
U83  Z0103MN  [SOT223]  62.74,135.64 0 top
U84  Z0103MN  [SOT223]  52.58,135.64 0 top
U85  Z0103MN  [SOT223]  42.42,135.64 0 top
U86  Z0103MN  [SOT223]  32.26,135.64 0 top
U87  Z0103MN  [SOT223]  32.26,96.27 180 top
U88  Z0103MN  [SOT223]  42.42,96.27 180 top
U89  Z0103MN  [SOT223]  52.58,96.27 180 top
U90  Z0103MN  [SOT223]  62.74,96.27 180 top
U91  MOC3063S  [DIP8SMD]  129.29,122.94 0 top
U92  MOC3063S  [DIP8SMD]  119.13,122.94 0 top
U93  MOC3063S  [DIP8SMD]  108.97,122.94 0 top
U94  MOC3063S  [DIP8SMD]  98.81,122.94 0 top
U95  MOC3063S  [DIP8SMD]  98.81,108.97 180 top
U96  MOC3063S  [DIP8SMD]  108.97,108.97 180 top
U97  MOC3063S  [DIP8SMD]  119.13,108.97 180 top
U98  MOC3063S  [DIP8SMD]  129.29,108.97 180 top
U99  LM317  [V-REG_DPACK]  128.02,87.38 90 top
U100  ARDUINO_SHIELD  [DUEMILANOVE_SHIELD_NOLABELS]  86.11,86.11 0 top
U101  Z0103MN  [SOT223]  129.29,135.64 0 top
U102  Z0103MN  [SOT223]  119.13,135.64 0 top
U103  Z0103MN  [SOT223]  108.97,135.64 0 top
U104  Z0103MN  [SOT223]  98.81,135.64 0 top
U105  Z0103MN  [SOT223]  98.81,96.27 180 top
U106  Z0103MN  [SOT223]  108.97,96.27 180 top
U107  Z0103MN  [SOT223]  119.13,96.27 180 top
U108  Z0103MN  [SOT223]  129.29,96.27 180 top
U109  MOC3063S  [DIP8SMD]  195.83,122.94 0 top
U110  MOC3063S  [DIP8SMD]  185.67,122.94 0 top
U111  MOC3063S  [DIP8SMD]  175.51,122.94 0 top
U112  MOC3063S  [DIP8SMD]  165.35,122.94 0 top
U113  MOC3063S  [DIP8SMD]  165.35,108.97 180 top
U114  MOC3063S  [DIP8SMD]  175.51,108.97 180 top
U115  MOC3063S  [DIP8SMD]  185.67,108.97 180 top
U116  MOC3063S  [DIP8SMD]  195.83,108.97 180 top
U117  LM317  [V-REG_DPACK]  194.56,87.38 90 top
U118  ARDUINO_SHIELD  [DUEMILANOVE_SHIELD_NOLABELS]  152.65,86.11 0 top
U119  Z0103MN  [SOT223]  195.83,135.64 0 top
U120  Z0103MN  [SOT223]  185.67,135.64 0 top
U121  Z0103MN  [SOT223]  175.51,135.64 0 top
U122  Z0103MN  [SOT223]  165.35,135.64 0 top
U123  Z0103MN  [SOT223]  165.35,96.27 180 top
U124  Z0103MN  [SOT223]  175.51,96.27 180 top
U125  Z0103MN  [SOT223]  185.67,96.27 180 top
U126  Z0103MN  [SOT223]  195.83,96.27 180 top
U127  MOC3063S  [DIP8SMD]  262.38,122.94 0 top
U128  MOC3063S  [DIP8SMD]  252.22,122.94 0 top
U129  MOC3063S  [DIP8SMD]  242.06,122.94 0 top
U130  MOC3063S  [DIP8SMD]  231.9,122.94 0 top
U131  MOC3063S  [DIP8SMD]  231.9,108.97 180 top
U132  MOC3063S  [DIP8SMD]  242.06,108.97 180 top
U133  MOC3063S  [DIP8SMD]  252.22,108.97 180 top
U134  MOC3063S  [DIP8SMD]  262.38,108.97 180 top
U135  LM317  [V-REG_DPACK]  261.11,87.38 90 top
U136  ARDUINO_SHIELD  [DUEMILANOVE_SHIELD_NOLABELS]  219.2,86.11 0 top
U137  Z0103MN  [SOT223]  262.38,135.64 0 top
U138  Z0103MN  [SOT223]  252.22,135.64 0 top
U139  Z0103MN  [SOT223]  242.06,135.64 0 top
U140  Z0103MN  [SOT223]  231.9,135.64 0 top
U141  Z0103MN  [SOT223]  231.9,96.27 180 top
U142  Z0103MN  [SOT223]  242.06,96.27 180 top
U143  Z0103MN  [SOT223]  252.22,96.27 180 top
U144  Z0103MN  [SOT223]  262.38,96.27 180 top
U$1  OSHW-LOGOS  [OSHW-LOGO-S]  89.92,74.17 180 top
U$2  OSHW-LOGOS  [OSHW-LOGO-S]  156.46,74.17 180 top
U$3  OSHW-LOGOS  [OSHW-LOGO-S]  223.01,74.17 180 top
U$4  OSHW-LOGOS  [OSHW-LOGO-S]  23.37,147.07 180 top
U$5  OSHW-LOGOS  [OSHW-LOGO-S]  23.37,74.17 180 top
U$6  OSHW-LOGOS  [OSHW-LOGO-S]  89.92,147.07 180 top
U$7  OSHW-LOGOS  [OSHW-LOGO-S]  156.46,147.07 180 top
U$8  OSHW-LOGOS  [OSHW-LOGO-S]  223.01,147.07 180 top

## Library data of the parts
C1-C16 CHAN_A CHAN_A1-CHAN_A7 CHAN_B CHAN_B1-CHAN_B7 CHAN_C CHAN_C1-CHAN_C7 CHAN_D CHAN_D1-CHAN_D7 CHAN_E CHAN_E1-CHAN_E7 CHAN_F CHAN_F1-CHAN_F7 CHAN_G CHAN_G1-CHAN_G7 CHAN_H CHAN_H1-CHAN_H7 D1-D8 JP1-JP136 R1-R232 SJ1-SJ8 U17 U18 U27 U28 U45 U46 U63 U64 U81 U82 U99 U100 U117 U118 U135 U136 U$1-U$8 = SparkFun
E$1 = SparkFun-Retired
E$5 E$6 = SparkFun-Aesthetics
U1-U16 U19-U26 U29-U44 U47-U62 U65-U80 U83-U98 U101-U116 U119-U134 U137-U144 = mike-temp

## Nets
EL_A: JP10.1 U1.1 U18.D2
EL_A1: JP30.1 U19.1 U28.D2
EL_A2: JP47.1 U37.1 U46.D2
EL_A3: JP64.1 U55.1 U64.D2
EL_A4: JP81.1 U73.1 U82.D2
EL_A5: JP98.1 U91.1 U100.D2
EL_A6: JP115.1 U109.1 U118.D2
EL_A7: JP132.1 U127.1 U136.D2
EL_B: JP10.2 U3.1 U18.D3
EL_B1: JP30.2 U20.1 U28.D3
EL_B2: JP47.2 U38.1 U46.D3
EL_B3: JP64.2 U56.1 U64.D3
EL_B4: JP81.2 U74.1 U82.D3
EL_B5: JP98.2 U92.1 U100.D3
EL_B6: JP115.2 U110.1 U118.D3
EL_B7: JP132.2 U128.1 U136.D3
EL_C: JP10.3 U5.1 U18.D4
EL_C1: JP30.3 U21.1 U28.D4
EL_C2: JP47.3 U39.1 U46.D4
EL_C3: JP64.3 U57.1 U64.D4
EL_C4: JP81.3 U75.1 U82.D4
EL_C5: JP98.3 U93.1 U100.D4
EL_C6: JP115.3 U111.1 U118.D4
EL_C7: JP132.3 U129.1 U136.D4
EL_D: JP10.4 U7.1 U18.D5
EL_D1: JP30.4 U22.1 U28.D5
EL_D2: JP47.4 U40.1 U46.D5
EL_D3: JP64.4 U58.1 U64.D5
EL_D4: JP81.4 U76.1 U82.D5
EL_D5: JP98.4 U94.1 U100.D5
EL_D6: JP115.4 U112.1 U118.D5
EL_D7: JP132.4 U130.1 U136.D5
EL_E: JP10.5 U9.1 U18.D6
EL_E1: JP30.5 U23.1 U28.D6
EL_E2: JP47.5 U41.1 U46.D6
EL_E3: JP64.5 U59.1 U64.D6
EL_E4: JP81.5 U77.1 U82.D6
EL_E5: JP98.5 U95.1 U100.D6
EL_E6: JP115.5 U113.1 U118.D6
EL_E7: JP132.5 U131.1 U136.D6
EL_F: JP10.6 U11.1 U18.D7
EL_F1: JP30.6 U24.1 U28.D7
EL_F2: JP47.6 U42.1 U46.D7
EL_F3: JP64.6 U60.1 U64.D7
EL_F4: JP81.6 U78.1 U82.D7
EL_F5: JP98.6 U96.1 U100.D7
EL_F6: JP115.6 U114.1 U118.D7
EL_F7: JP132.6 U132.1 U136.D7
EL_G: JP10.7 U13.1 U18.D8
EL_G1: JP30.7 U25.1 U28.D8
EL_G2: JP47.7 U43.1 U46.D8
EL_G3: JP64.7 U61.1 U64.D8
EL_G4: JP81.7 U79.1 U82.D8
EL_G5: JP98.7 U97.1 U100.D8
EL_G6: JP115.7 U115.1 U118.D8
EL_G7: JP132.7 U133.1 U136.D8
EL_H: JP10.8 U15.1 U18.D9
EL_H1: JP30.8 U26.1 U28.D9
EL_H2: JP47.8 U44.1 U46.D9
EL_H3: JP64.8 U62.1 U64.D9
EL_H4: JP81.8 U80.1 U82.D9
EL_H5: JP98.8 U98.1 U100.D9
EL_H6: JP115.8 U116.1 U118.D9
EL_H7: JP132.8 U134.1 U136.D9
GND: C1.2 C2.C D1.C JP11.1 JP12.2 R2.1 R5.1 R8.1 R11.1 R14.1 R17.1 R20.1 R23.1 R26.1 R28.P$1 U18.GND@0 U18.GND@1 U18.GND@2
GND1: C3.2 C4.C D2.C JP18.1 JP22.2 R32.1 R35.1 R38.1 R41.1 R44.1 R47.1 R50.1 R53.1 R55.1 R57.P$1 U28.GND@0 U28.GND@1 U28.GND@2
GND2: C5.2 C6.C D3.C JP35.1 JP39.2 R61.1 R64.1 R67.1 R70.1 R73.1 R76.1 R79.1 R82.1 R84.1 R86.P$1 U46.GND@0 U46.GND@1 U46.GND@2
GND3: C7.2 C8.C D4.C JP52.1 JP56.2 R90.1 R93.1 R96.1 R99.1 R102.1 R105.1 R108.1 R111.1 R113.1 R115.P$1 U64.GND@0 U64.GND@1 U64.GND@2
GND4: C9.2 C10.C D5.C JP69.1 JP73.2 R119.1 R122.1 R125.1 R128.1 R131.1 R134.1 R137.1 R140.1 R142.1 R144.P$1 U82.GND@0 U82.GND@1 U82.GND@2
GND5: C11.2 C12.C D6.C JP86.1 JP90.2 R148.1 R151.1 R154.1 R157.1 R160.1 R163.1 R166.1 R169.1 R171.1 R173.P$1 U100.GND@0 U100.GND@1 U100.GND@2
GND6: C13.2 C14.C D7.C JP103.1 JP107.2 R177.1 R180.1 R183.1 R186.1 R189.1 R192.1 R195.1 R198.1 R200.1 R202.P$1 U118.GND@0 U118.GND@1 U118.GND@2
GND7: C15.2 C16.C D8.C JP120.1 JP124.2 R206.1 R209.1 R212.1 R215.1 R218.1 R221.1 R224.1 R227.1 R229.1 R231.P$1 U136.GND@0 U136.GND@1 U136.GND@2
HV: JP13.1 JP14.2 U2.4 U4.4 U6.4 U8.4 U10.4 U12.4 U14.4 U16.4
HV1: JP19.2 JP21.1 U29.4 U30.4 U31.4 U32.4 U33.4 U34.4 U35.4 U36.4
HV2: JP36.2 JP38.1 U47.4 U48.4 U49.4 U50.4 U51.4 U52.4 U53.4 U54.4
HV3: JP53.2 JP55.1 U65.4 U66.4 U67.4 U68.4 U69.4 U70.4 U71.4 U72.4
HV4: JP70.2 JP72.1 U83.4 U84.4 U85.4 U86.4 U87.4 U88.4 U89.4 U90.4
HV5: JP87.2 JP89.1 U101.4 U102.4 U103.4 U104.4 U105.4 U106.4 U107.4 U108.4
HV6: JP104.2 JP106.1 U119.4 U120.4 U121.4 U122.4 U123.4 U124.4 U125.4 U126.4
HV7: JP121.2 JP123.1 U137.4 U138.4 U139.4 U140.4 U141.4 U142.4 U143.4 U144.4
HVGND: CHAN_A.1 CHAN_B.1 CHAN_C.1 CHAN_D.1 CHAN_E.1 CHAN_F.1 CHAN_G.1 CHAN_H.1 JP1.1 JP2.1 JP3.1 JP4.1 JP5.1 JP6.1 JP7.1 JP8.1 JP13.2 JP14.1
HVGND1: CHAN_A1.1 CHAN_B1.1 CHAN_C1.1 CHAN_D1.1 CHAN_E1.1 CHAN_F1.1 CHAN_G1.1 CHAN_H1.1 JP19.1 JP20.1 JP21.2 JP23.1 JP24.1 JP25.1 JP26.1 JP27.1 JP28.1 JP29.1
HVGND2: CHAN_A2.1 CHAN_B2.1 CHAN_C2.1 CHAN_D2.1 CHAN_E2.1 CHAN_F2.1 CHAN_G2.1 CHAN_H2.1 JP36.1 JP37.1 JP38.2 JP40.1 JP41.1 JP42.1 JP43.1 JP44.1 JP45.1 JP46.1
HVGND3: CHAN_A3.1 CHAN_B3.1 CHAN_C3.1 CHAN_D3.1 CHAN_E3.1 CHAN_F3.1 CHAN_G3.1 CHAN_H3.1 JP53.1 JP54.1 JP55.2 JP57.1 JP58.1 JP59.1 JP60.1 JP61.1 JP62.1 JP63.1
HVGND4: CHAN_A4.1 CHAN_B4.1 CHAN_C4.1 CHAN_D4.1 CHAN_E4.1 CHAN_F4.1 CHAN_G4.1 CHAN_H4.1 JP70.1 JP71.1 JP72.2 JP74.1 JP75.1 JP76.1 JP77.1 JP78.1 JP79.1 JP80.1
HVGND5: CHAN_A5.1 CHAN_B5.1 CHAN_C5.1 CHAN_D5.1 CHAN_E5.1 CHAN_F5.1 CHAN_G5.1 CHAN_H5.1 JP87.1 JP88.1 JP89.2 JP91.1 JP92.1 JP93.1 JP94.1 JP95.1 JP96.1 JP97.1
HVGND6: CHAN_A6.1 CHAN_B6.1 CHAN_C6.1 CHAN_D6.1 CHAN_E6.1 CHAN_F6.1 CHAN_G6.1 CHAN_H6.1 JP104.1 JP105.1 JP106.2 JP108.1 JP109.1 JP110.1 JP111.1 JP112.1 JP113.1 JP114.1
HVGND7: CHAN_A7.1 CHAN_B7.1 CHAN_C7.1 CHAN_D7.1 CHAN_E7.1 CHAN_F7.1 CHAN_G7.1 CHAN_H7.1 JP121.1 JP122.1 JP123.2 JP125.1 JP126.1 JP127.1 JP128.1 JP129.1 JP130.1 JP131.1
INV: C2.A JP11.2 JP12.1 R27.2 R29.P$2 SJ1.2 U17.4
INV1: C4.A JP18.2 JP22.1 R56.2 R58.P$2 SJ2.2 U27.4
INV2: C6.A JP35.2 JP39.1 R85.2 R87.P$2 SJ3.2 U45.4
INV3: C8.A JP52.2 JP56.1 R114.2 R116.P$2 SJ4.2 U63.4
INV4: C10.A JP69.2 JP73.1 R143.2 R145.P$2 SJ5.2 U81.4
INV5: C12.A JP86.2 JP90.1 R172.2 R174.P$2 SJ6.2 U99.4
INV6: C14.A JP103.2 JP107.1 R201.2 R203.P$2 SJ7.2 U117.4
INV7: C16.A JP120.2 JP124.1 R230.2 R232.P$2 SJ8.2 U135.4
N$1: R2.2 U1.2
N$2: R26.2 R27.1 R28.P$2 R29.P$1 U17.1
N$3: R1.1 U1.6
N$4: R25.2 U18.D10
N$5: R6.1 U3.4 U4.3
N$6: R5.2 U3.2
N$7: R4.1 U3.6
N$8: CHAN_B.2 JP2.2 R6.2 U4.1
N$9: R1.2 U2.2
N$10: R9.1 U5.4 U6.3
N$11: R8.2 U5.2
N$12: R7.1 U5.6
N$13: CHAN_C.2 JP3.2 R9.2 U6.1
N$14: D1.A R25.1
N$15: R4.2 U4.2
N$16: R12.1 U7.4 U8.3
N$17: R11.2 U7.2
N$18: R10.1 U7.6
N$19: CHAN_D.2 JP4.2 R12.2 U8.1
N$20: R7.2 U6.2
N$21: CHAN_A.2 JP1.2 R3.2 U2.1
N$22: R15.1 U9.4 U10.3
N$23: R14.2 U9.2
N$24: R13.1 U9.6
N$25: CHAN_E.2 JP5.2 R15.2 U10.1
N$26: R10.2 U8.2
N$27: R18.1 U11.4 U12.3
N$28: R17.2 U11.2
N$29: R16.1 U11.6
N$30: CHAN_F.2 JP6.2 R18.2 U12.1
N$31: R13.2 U10.2
N$32: R21.1 U13.4 U14.3
N$33: R20.2 U13.2
N$34: R19.1 U13.6
N$35: CHAN_G.2 JP7.2 R21.2 U14.1
N$36: R16.2 U12.2
N$37: R24.1 U15.4 U16.3
N$38: R23.2 U15.2
N$39: R22.1 U15.6
N$40: CHAN_H.2 JP8.2 R24.2 U16.1
N$41: R19.2 U14.2
N$42: R22.2 U16.2
N$43: D2.A R30.1
N$44: R33.1 U19.4 U29.3
N$45: R32.2 U19.2
N$46: R31.1 U19.6
N$47: CHAN_A1.2 JP20.2 R33.2 U29.1
N$48: R36.1 U20.4 U30.3
N$49: R35.2 U20.2
N$50: R34.1 U20.6
N$51: CHAN_B1.2 JP23.2 R36.2 U30.1
N$52: R39.1 U21.4 U31.3
N$53: R38.2 U21.2
N$54: R37.1 U21.6
N$55: CHAN_C1.2 JP24.2 R39.2 U31.1
N$56: R42.1 U22.4 U32.3
N$57: R41.2 U22.2
N$58: R40.1 U22.6
N$59: CHAN_D1.2 JP25.2 R42.2 U32.1
N$60: R45.1 U23.4 U33.3
N$61: R44.2 U23.2
N$62: R43.1 U23.6
N$63: CHAN_E1.2 JP26.2 R45.2 U33.1
N$64: R48.1 U24.4 U34.3
N$65: R47.2 U24.2
N$66: R46.1 U24.6
N$67: CHAN_F1.2 JP27.2 R48.2 U34.1
N$68: R51.1 U25.4 U35.3
N$69: R50.2 U25.2
N$70: R49.1 U25.6
N$71: CHAN_G1.2 JP28.2 R51.2 U35.1
N$72: R54.1 U26.4 U36.3
N$73: R53.2 U26.2
N$74: R52.1 U26.6
N$75: CHAN_H1.2 JP29.2 R54.2 U36.1
N$76: R55.2 R56.1 R57.P$2 R58.P$1 U27.1
N$77: R31.2 U29.2
N$78: R34.2 U30.2
N$79: R37.2 U31.2
N$80: R40.2 U32.2
N$81: R43.2 U33.2
N$82: R46.2 U34.2
N$83: R49.2 U35.2
N$84: R52.2 U36.2
N$85: R30.2 U28.D10
N$86: D3.A R59.1
N$87: R62.1 U37.4 U47.3
N$88: R61.2 U37.2
N$89: R60.1 U37.6
N$90: CHAN_A2.2 JP37.2 R62.2 U47.1
N$91: R65.1 U38.4 U48.3
N$92: R64.2 U38.2
N$93: R63.1 U38.6
N$94: CHAN_B2.2 JP40.2 R65.2 U48.1
N$95: R68.1 U39.4 U49.3
N$96: R67.2 U39.2
N$97: R66.1 U39.6
N$98: CHAN_C2.2 JP41.2 R68.2 U49.1
N$99: R71.1 U40.4 U50.3
N$100: R70.2 U40.2
N$101: R69.1 U40.6
N$102: CHAN_D2.2 JP42.2 R71.2 U50.1
N$103: R74.1 U41.4 U51.3
N$104: R73.2 U41.2
N$105: R72.1 U41.6
N$106: CHAN_E2.2 JP43.2 R74.2 U51.1
N$107: R77.1 U42.4 U52.3
N$108: R76.2 U42.2
N$109: R75.1 U42.6
N$110: CHAN_F2.2 JP44.2 R77.2 U52.1
N$111: R80.1 U43.4 U53.3
N$112: R79.2 U43.2
N$113: R78.1 U43.6
N$114: CHAN_G2.2 JP45.2 R80.2 U53.1
N$115: R83.1 U44.4 U54.3
N$116: R82.2 U44.2
N$117: R3.1 U1.4 U2.3
N$118: R81.1 U44.6
N$119: CHAN_H2.2 JP46.2 R83.2 U54.1
N$120: R84.2 R85.1 R86.P$2 R87.P$1 U45.1
N$121: R60.2 U47.2
N$122: R63.2 U48.2
N$123: R66.2 U49.2
N$124: R69.2 U50.2
N$125: R72.2 U51.2
N$126: R75.2 U52.2
N$127: R78.2 U53.2
N$128: R81.2 U54.2
N$129: R59.2 U46.D10
N$130: D4.A R88.1
N$131: R91.1 U55.4 U65.3
N$132: R90.2 U55.2
N$133: R89.1 U55.6
N$134: CHAN_A3.2 JP54.2 R91.2 U65.1
N$135: R94.1 U56.4 U66.3
N$136: R93.2 U56.2
N$137: R92.1 U56.6
N$138: CHAN_B3.2 JP57.2 R94.2 U66.1
N$139: R97.1 U57.4 U67.3
N$140: R96.2 U57.2
N$141: R95.1 U57.6
N$142: CHAN_C3.2 JP58.2 R97.2 U67.1
N$143: R100.1 U58.4 U68.3
N$144: R99.2 U58.2
N$145: R98.1 U58.6
N$146: CHAN_D3.2 JP59.2 R100.2 U68.1
N$147: R103.1 U59.4 U69.3
N$148: R102.2 U59.2
N$149: R101.1 U59.6
N$150: CHAN_E3.2 JP60.2 R103.2 U69.1
N$151: R106.1 U60.4 U70.3
N$152: R105.2 U60.2
N$153: R104.1 U60.6
N$154: CHAN_F3.2 JP61.2 R106.2 U70.1
N$155: R109.1 U61.4 U71.3
N$156: R108.2 U61.2
N$157: R107.1 U61.6
N$158: CHAN_G3.2 JP62.2 R109.2 U71.1
N$159: R112.1 U62.4 U72.3
N$160: R111.2 U62.2
N$161: R110.1 U62.6
N$162: CHAN_H3.2 JP63.2 R112.2 U72.1
N$163: R113.2 R114.1 R115.P$2 R116.P$1 U63.1
N$164: R89.2 U65.2
N$165: R92.2 U66.2
N$166: R95.2 U67.2
N$167: R98.2 U68.2
N$168: R101.2 U69.2
N$169: R104.2 U70.2
N$170: R107.2 U71.2
N$171: R110.2 U72.2
N$172: R88.2 U64.D10
N$173: D5.A R117.1
N$174: R120.1 U73.4 U83.3
N$175: R119.2 U73.2
N$176: R118.1 U73.6
N$177: CHAN_A4.2 JP71.2 R120.2 U83.1
N$178: R123.1 U74.4 U84.3
N$179: R122.2 U74.2
N$180: R121.1 U74.6
N$181: CHAN_B4.2 JP74.2 R123.2 U84.1
N$182: R126.1 U75.4 U85.3
N$183: R125.2 U75.2
N$184: R124.1 U75.6
N$185: CHAN_C4.2 JP75.2 R126.2 U85.1
N$186: R129.1 U76.4 U86.3
N$187: R128.2 U76.2
N$188: R127.1 U76.6
N$189: CHAN_D4.2 JP76.2 R129.2 U86.1
N$190: R132.1 U77.4 U87.3
N$191: R131.2 U77.2
N$192: R130.1 U77.6
N$193: CHAN_E4.2 JP77.2 R132.2 U87.1
N$194: R135.1 U78.4 U88.3
N$195: R134.2 U78.2
N$196: R133.1 U78.6
N$197: CHAN_F4.2 JP78.2 R135.2 U88.1
N$198: R138.1 U79.4 U89.3
N$199: R137.2 U79.2
N$200: R136.1 U79.6
N$201: CHAN_G4.2 JP79.2 R138.2 U89.1
N$202: R141.1 U80.4 U90.3
N$203: R140.2 U80.2
N$204: R139.1 U80.6
N$205: CHAN_H4.2 JP80.2 R141.2 U90.1
N$206: R142.2 R143.1 R144.P$2 R145.P$1 U81.1
N$207: R118.2 U83.2
N$208: R121.2 U84.2
N$209: R124.2 U85.2
N$210: R127.2 U86.2
N$211: R130.2 U87.2
N$212: R133.2 U88.2
N$213: R136.2 U89.2
N$214: R139.2 U90.2
N$215: R117.2 U82.D10
N$216: D6.A R146.1
N$217: R149.1 U91.4 U101.3
N$218: R148.2 U91.2
N$219: R147.1 U91.6
N$220: CHAN_A5.2 JP88.2 R149.2 U101.1
N$221: R152.1 U92.4 U102.3
N$222: R151.2 U92.2
N$223: R150.1 U92.6
N$224: CHAN_B5.2 JP91.2 R152.2 U102.1
N$225: R155.1 U93.4 U103.3
N$226: R154.2 U93.2
N$227: R153.1 U93.6
N$228: CHAN_C5.2 JP92.2 R155.2 U103.1
N$229: R158.1 U94.4 U104.3
N$230: R157.2 U94.2
N$231: R156.1 U94.6
N$232: CHAN_D5.2 JP93.2 R158.2 U104.1
N$233: R161.1 U95.4 U105.3
N$234: R160.2 U95.2
N$235: R159.1 U95.6
N$236: CHAN_E5.2 JP94.2 R161.2 U105.1
N$237: R164.1 U96.4 U106.3
N$238: R163.2 U96.2
N$239: R162.1 U96.6
N$240: CHAN_F5.2 JP95.2 R164.2 U106.1
N$241: R167.1 U97.4 U107.3
N$242: R166.2 U97.2
N$243: R165.1 U97.6
N$244: CHAN_G5.2 JP96.2 R167.2 U107.1
N$245: R170.1 U98.4 U108.3
N$246: R169.2 U98.2
N$247: R168.1 U98.6
N$248: CHAN_H5.2 JP97.2 R170.2 U108.1
N$249: R171.2 R172.1 R173.P$2 R174.P$1 U99.1
N$250: R147.2 U101.2
N$251: R150.2 U102.2
N$252: R153.2 U103.2
N$253: R156.2 U104.2
N$254: R159.2 U105.2
N$255: R162.2 U106.2
N$256: R165.2 U107.2
N$257: R168.2 U108.2
N$258: R146.2 U100.D10
N$259: D7.A R175.1
N$260: R178.1 U109.4 U119.3
N$261: R177.2 U109.2
N$262: R176.1 U109.6
N$263: CHAN_A6.2 JP105.2 R178.2 U119.1
N$264: R181.1 U110.4 U120.3
N$265: R180.2 U110.2
N$266: R179.1 U110.6
N$267: CHAN_B6.2 JP108.2 R181.2 U120.1
N$268: R184.1 U111.4 U121.3
N$269: R183.2 U111.2
N$270: R182.1 U111.6
N$271: CHAN_C6.2 JP109.2 R184.2 U121.1
N$272: R187.1 U112.4 U122.3
N$273: R186.2 U112.2
N$274: R185.1 U112.6
N$275: CHAN_D6.2 JP110.2 R187.2 U122.1
N$276: R190.1 U113.4 U123.3
N$277: R189.2 U113.2
N$278: R188.1 U113.6
N$279: CHAN_E6.2 JP111.2 R190.2 U123.1
N$280: R193.1 U114.4 U124.3
N$281: R192.2 U114.2
N$282: R191.1 U114.6
N$283: CHAN_F6.2 JP112.2 R193.2 U124.1
N$284: R196.1 U115.4 U125.3
N$285: R195.2 U115.2
N$286: R194.1 U115.6
N$287: CHAN_G6.2 JP113.2 R196.2 U125.1
N$288: R199.1 U116.4 U126.3
N$289: R198.2 U116.2
N$290: R197.1 U116.6
N$291: CHAN_H6.2 JP114.2 R199.2 U126.1
N$292: R200.2 R201.1 R202.P$2 R203.P$1 U117.1
N$293: R176.2 U119.2
N$294: R179.2 U120.2
N$295: R182.2 U121.2
N$296: R185.2 U122.2
N$297: R188.2 U123.2
N$298: R191.2 U124.2
N$299: R194.2 U125.2
N$300: R197.2 U126.2
N$301: R175.2 U118.D10
N$302: D8.A R204.1
N$303: R207.1 U127.4 U137.3
N$304: R206.2 U127.2
N$305: R205.1 U127.6
N$306: CHAN_A7.2 JP122.2 R207.2 U137.1
N$307: R210.1 U128.4 U138.3
N$308: R209.2 U128.2
N$309: R208.1 U128.6
N$310: CHAN_B7.2 JP125.2 R210.2 U138.1
N$311: R213.1 U129.4 U139.3
N$312: R212.2 U129.2
N$313: R211.1 U129.6
N$314: CHAN_C7.2 JP126.2 R213.2 U139.1
N$315: R216.1 U130.4 U140.3
N$316: R215.2 U130.2
N$317: R214.1 U130.6
N$318: CHAN_D7.2 JP127.2 R216.2 U140.1
N$319: R219.1 U131.4 U141.3
N$320: R218.2 U131.2
N$321: R217.1 U131.6
N$322: CHAN_E7.2 JP128.2 R219.2 U141.1
N$323: R222.1 U132.4 U142.3
N$324: R221.2 U132.2
N$325: R220.1 U132.6
N$326: CHAN_F7.2 JP129.2 R222.2 U142.1
N$327: R225.1 U133.4 U143.3
N$328: R224.2 U133.2
N$329: R223.1 U133.6
N$330: CHAN_G7.2 JP130.2 R225.2 U143.1
N$331: R228.1 U134.4 U144.3
N$332: R227.2 U134.2
N$333: R226.1 U134.6
N$334: CHAN_H7.2 JP131.2 R228.2 U144.1
N$335: R229.2 R230.1 R231.P$2 R232.P$1 U135.1
N$336: R205.2 U137.2
N$337: R208.2 U138.2
N$338: R211.2 U139.2
N$339: R214.2 U140.2
N$340: R217.2 U141.2
N$341: R220.2 U142.2
N$342: R223.2 U143.2
N$343: R226.2 U144.2
N$344: R204.2 U136.D10
RAW: C1.1 SJ1.1 U17.3 U18.VIN
RAW1: C3.1 SJ2.1 U27.3 U28.VIN
RAW2: C5.1 SJ3.1 U45.3 U46.VIN
RAW3: C7.1 SJ4.1 U63.3 U64.VIN
RAW4: C9.1 SJ5.1 U81.3 U82.VIN
RAW5: C11.1 SJ6.1 U99.3 U100.VIN
RAW6: C13.1 SJ7.1 U117.3 U118.VIN
RAW7: C15.1 SJ8.1 U135.3 U136.VIN

## Tracks (layer width: path | path; a pad name or v marks a point on that pad's centre or on a via)
EL_A  (via drill 0.51)
  Top 0.406: v60.2,50.04 U1.1
  Bottom 0.406: v60.2,50.04 37.34,50.04 JP10.1 U18.D2
EL_A1  (via drill 0.51)
  Top 0.406: v126.75,50.04 U19.1
  Bottom 0.406: v126.75,50.04 103.89,50.04 JP30.1 U28.D2
EL_A2  (via drill 0.51)
  Top 0.406: v193.29,50.04 U37.1
  Bottom 0.406: v193.29,50.04 170.43,50.04 JP47.1 U46.D2
EL_A3  (via drill 0.51)
  Top 0.406: v259.84,50.04 U55.1
  Bottom 0.406: v259.84,50.04 236.98,50.04 JP64.1 U64.D2
EL_A4  (via drill 0.51)
  Top 0.406: v60.2,122.94 U73.1
  Bottom 0.406: v60.2,122.94 37.34,122.94 JP81.1 U82.D2
EL_A5  (via drill 0.51)
  Top 0.406: v126.75,122.94 U91.1
  Bottom 0.406: v126.75,122.94 103.89,122.94 JP98.1 U100.D2
EL_A6  (via drill 0.51)
  Top 0.406: v193.29,122.94 U109.1
  Bottom 0.406: v193.29,122.94 170.43,122.94 JP115.1 U118.D2
EL_A7  (via drill 0.51)
  Top 0.406: v259.84,122.94 U127.1
  Bottom 0.406: v259.84,122.94 236.98,122.94 JP132.1 U136.D2
EL_B  (via drill 0.51)
  Top 0.406: v50.04,48.77 U3.1
  Bottom 0.406: v50.04,48.77 36.07,48.77 JP10.2 U18.D3
EL_B1  (via drill 0.51)
  Top 0.406: v116.59,48.77 U20.1
  Bottom 0.406: v116.59,48.77 102.62,48.77 JP30.2 U28.D3
EL_B2  (via drill 0.51)
  Top 0.406: v183.13,48.77 U38.1
  Bottom 0.406: v183.13,48.77 169.16,48.77 JP47.2 U46.D3
EL_B3  (via drill 0.51)
  Top 0.406: v249.68,48.77 U56.1
  Bottom 0.406: v249.68,48.77 235.71,48.77 JP64.2 U64.D3
EL_B4  (via drill 0.51)
  Top 0.406: v50.04,121.67 U74.1
  Bottom 0.406: v50.04,121.67 36.07,121.67 JP81.2 U82.D3
EL_B5  (via drill 0.51)
  Top 0.406: v116.59,121.67 U92.1
  Bottom 0.406: v116.59,121.67 102.62,121.67 JP98.2 U100.D3
EL_B6  (via drill 0.51)
  Top 0.406: v183.13,121.67 U110.1
  Bottom 0.406: v183.13,121.67 169.16,121.67 JP115.2 U118.D3
EL_B7  (via drill 0.51)
  Top 0.406: v249.68,121.67 U128.1
  Bottom 0.406: v249.68,121.67 235.71,121.67 JP132.2 U136.D3
EL_C  (via drill 0.51)
  Top 0.406: v39.88,47.5 U5.1
  Bottom 0.406: v39.88,47.5 34.8,47.5 JP10.3 U18.D4
EL_C1  (via drill 0.51)
  Top 0.406: v106.43,47.5 U21.1
  Bottom 0.406: v106.43,47.5 101.35,47.5 JP30.3 U28.D4
EL_C2  (via drill 0.51)
  Top 0.406: v172.97,47.5 U39.1
  Bottom 0.406: v172.97,47.5 167.89,47.5 JP47.3 U46.D4
EL_C3  (via drill 0.51)
  Top 0.406: v239.52,47.5 U57.1
  Bottom 0.406: v239.52,47.5 234.44,47.5 JP64.3 U64.D4
EL_C4  (via drill 0.51)
  Top 0.406: v39.88,120.4 U75.1
  Bottom 0.406: v39.88,120.4 34.8,120.4 JP81.3 U82.D4
EL_C5  (via drill 0.51)
  Top 0.406: v106.43,120.4 U93.1
  Bottom 0.406: v106.43,120.4 101.35,120.4 JP98.3 U100.D4
EL_C6  (via drill 0.51)
  Top 0.406: v172.97,120.4 U111.1
  Bottom 0.406: v172.97,120.4 167.89,120.4 JP115.3 U118.D4
EL_C7  (via drill 0.51)
  Top 0.406: v239.52,120.4 U129.1
  Bottom 0.406: v239.52,120.4 234.44,120.4 JP132.3 U136.D4
EL_D  (via drill 0.51)
  Top 0.406: U7.1 29.72,46.6 30.62,47.5 v32.26,47.5
  Bottom 0.406: v32.26,47.5 JP10.4 U18.D5
EL_D1  (via drill 0.51)
  Top 0.406: U22.1 96.27,46.6 97.16,47.5 v98.81,47.5
  Bottom 0.406: v98.81,47.5 JP30.4 U28.D5
EL_D2  (via drill 0.51)
  Top 0.406: U40.1 162.81,46.6 163.71,47.5 v165.35,47.5
  Bottom 0.406: v165.35,47.5 JP47.4 U46.D5
EL_D3  (via drill 0.51)
  Top 0.406: U58.1 229.36,46.6 230.26,47.5 v231.9,47.5
  Bottom 0.406: v231.9,47.5 JP64.4 U64.D5
EL_D4  (via drill 0.51)
  Top 0.406: U76.1 29.72,119.5 30.62,120.4 v32.26,120.4
  Bottom 0.406: v32.26,120.4 JP81.4 U82.D5
EL_D5  (via drill 0.51)
  Top 0.406: U94.1 96.27,119.5 97.16,120.4 v98.81,120.4
  Bottom 0.406: v98.81,120.4 JP98.4 U100.D5
EL_D6  (via drill 0.51)
  Top 0.406: U112.1 162.81,119.5 163.71,120.4 v165.35,120.4
  Bottom 0.406: v165.35,120.4 JP115.4 U118.D5
EL_D7  (via drill 0.51)
  Top 0.406: U130.1 229.36,119.5 230.26,120.4 v231.9,120.4
  Bottom 0.406: v231.9,120.4 JP132.4 U136.D5
EL_E  (via drill 0.51)
  Top 0.406: v36.7,40.51 34.8,40.51 U9.1
  Bottom 0.406: v36.7,40.51 JP10.5 U18.D6
EL_E1  (via drill 0.51)
  Top 0.406: v103.25,40.51 101.35,40.51 U23.1
  Bottom 0.406: v103.25,40.51 JP30.5 U28.D6
EL_E2  (via drill 0.51)
  Top 0.406: v169.8,40.51 167.89,40.51 U41.1
  Bottom 0.406: v169.8,40.51 JP47.5 U46.D6
EL_E3  (via drill 0.51)
  Top 0.406: v236.35,40.51 234.44,40.51 U59.1
  Bottom 0.406: v236.35,40.51 JP64.5 U64.D6
EL_E4  (via drill 0.51)
  Top 0.406: v36.7,113.41 34.8,113.41 U77.1
  Bottom 0.406: v36.7,113.41 JP81.5 U82.D6
EL_E5  (via drill 0.51)
  Top 0.406: v103.25,113.41 101.35,113.41 U95.1
  Bottom 0.406: v103.25,113.41 JP98.5 U100.D6
EL_E6  (via drill 0.51)
  Top 0.406: v169.8,113.41 167.89,113.41 U113.1
  Bottom 0.406: v169.8,113.41 JP115.5 U118.D6
EL_E7  (via drill 0.51)
  Top 0.406: v236.35,113.41 234.44,113.41 U131.1
  Bottom 0.406: v236.35,113.41 JP132.5 U136.D6
EL_F  (via drill 0.51)
  Top 0.406: v44.96,38.61 U11.1
  Bottom 0.406: v44.96,38.61 36.07,38.61 JP10.6 U18.D7
EL_F1  (via drill 0.51)
  Top 0.406: v111.51,38.61 U24.1
  Bottom 0.406: v111.51,38.61 102.62,38.61 JP30.6 U28.D7
EL_F2  (via drill 0.51)
  Top 0.406: v178.05,38.61 U42.1
  Bottom 0.406: v178.05,38.61 169.16,38.61 JP47.6 U46.D7
EL_F3  (via drill 0.51)
  Top 0.406: v244.6,38.61 U60.1
  Bottom 0.406: v244.6,38.61 235.71,38.61 JP64.6 U64.D7
EL_F4  (via drill 0.51)
  Top 0.406: v44.96,111.51 U78.1
  Bottom 0.406: v44.96,111.51 36.07,111.51 JP81.6 U82.D7
EL_F5  (via drill 0.51)
  Top 0.406: v111.51,111.51 U96.1
  Bottom 0.406: v111.51,111.51 102.62,111.51 JP98.6 U100.D7
EL_F6  (via drill 0.51)
  Top 0.406: v178.05,111.51 U114.1
  Bottom 0.406: v178.05,111.51 169.16,111.51 JP115.6 U118.D7
EL_F7  (via drill 0.51)
  Top 0.406: v244.6,111.51 U132.1
  Bottom 0.406: v244.6,111.51 235.71,111.51 JP132.6 U136.D7
EL_G  (via drill 0.51)
  Top 0.406: v55.12,37.34 U13.1
  Bottom 0.406: v55.12,37.34 34.8,37.34 JP10.7 23.37,47.5 U18.D8
EL_G1  (via drill 0.51)
  Top 0.406: v121.67,37.34 U25.1
  Bottom 0.406: v121.67,37.34 101.35,37.34 JP30.7 89.92,47.5 U28.D8
EL_G2  (via drill 0.51)
  Top 0.406: v188.21,37.34 U43.1
  Bottom 0.406: v188.21,37.34 167.89,37.34 JP47.7 156.46,47.5 U46.D8
EL_G3  (via drill 0.51)
  Top 0.406: v254.76,37.34 U61.1
  Bottom 0.406: v254.76,37.34 234.44,37.34 JP64.7 223.01,47.5 U64.D8
EL_G4  (via drill 0.51)
  Top 0.406: v55.12,110.24 U79.1
  Bottom 0.406: v55.12,110.24 34.8,110.24 JP81.7 23.37,120.4 U82.D8
EL_G5  (via drill 0.51)
  Top 0.406: v121.67,110.24 U97.1
  Bottom 0.406: v121.67,110.24 101.35,110.24 JP98.7 89.92,120.4 U100.D8
EL_G6  (via drill 0.51)